# Altium PCB PCB_EECD1_2_2023-01-18.pcbdoc
Units mm, origin at the board's own origin, x right, y up, seen from the top; angles counter-clockwise.
Board outline 94.24 x 78.84 mm, 2 copper layers (Top Layer, Bottom Layer); 37 components, 61 nets, 163 pads, 0 vias.
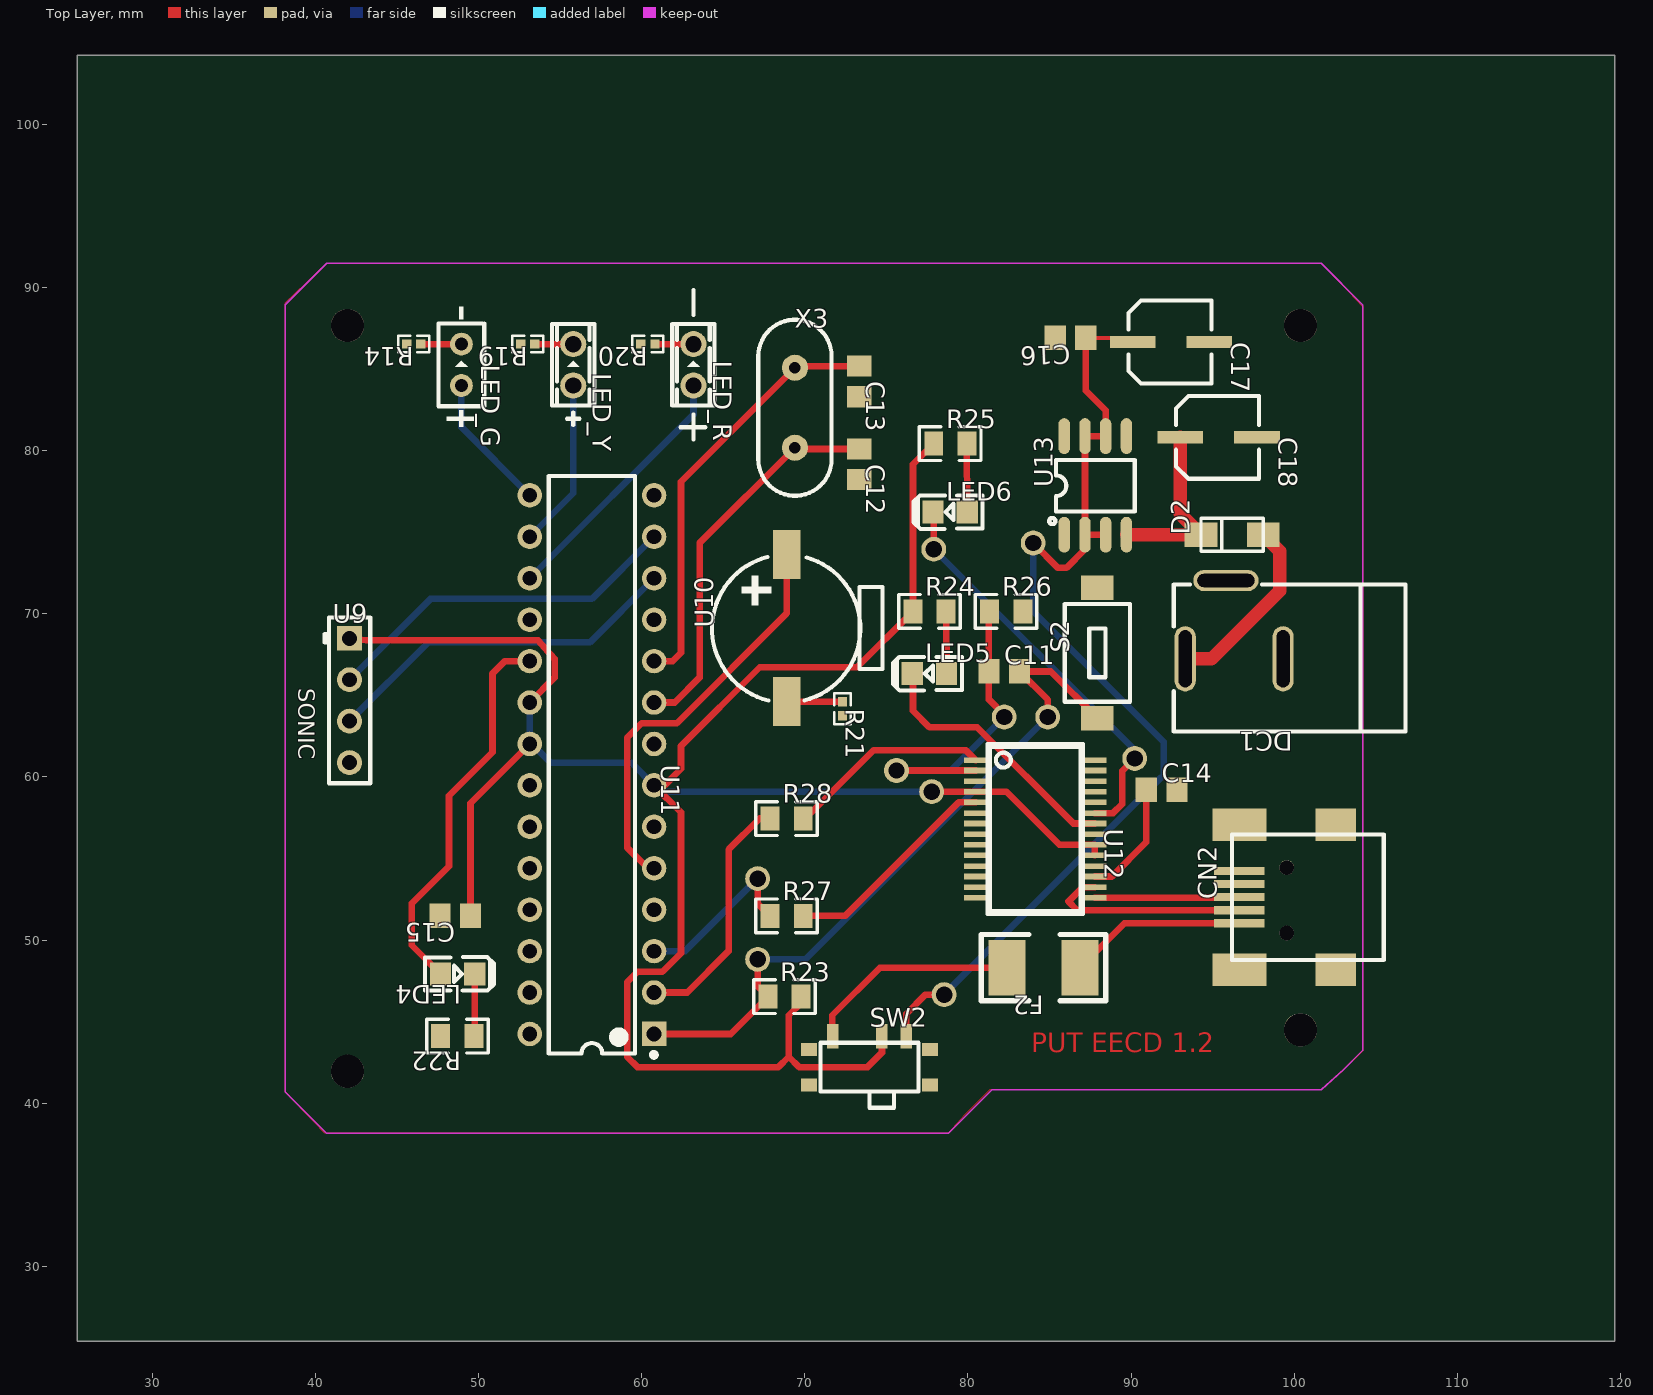
[diagram p0: Top Layer view]
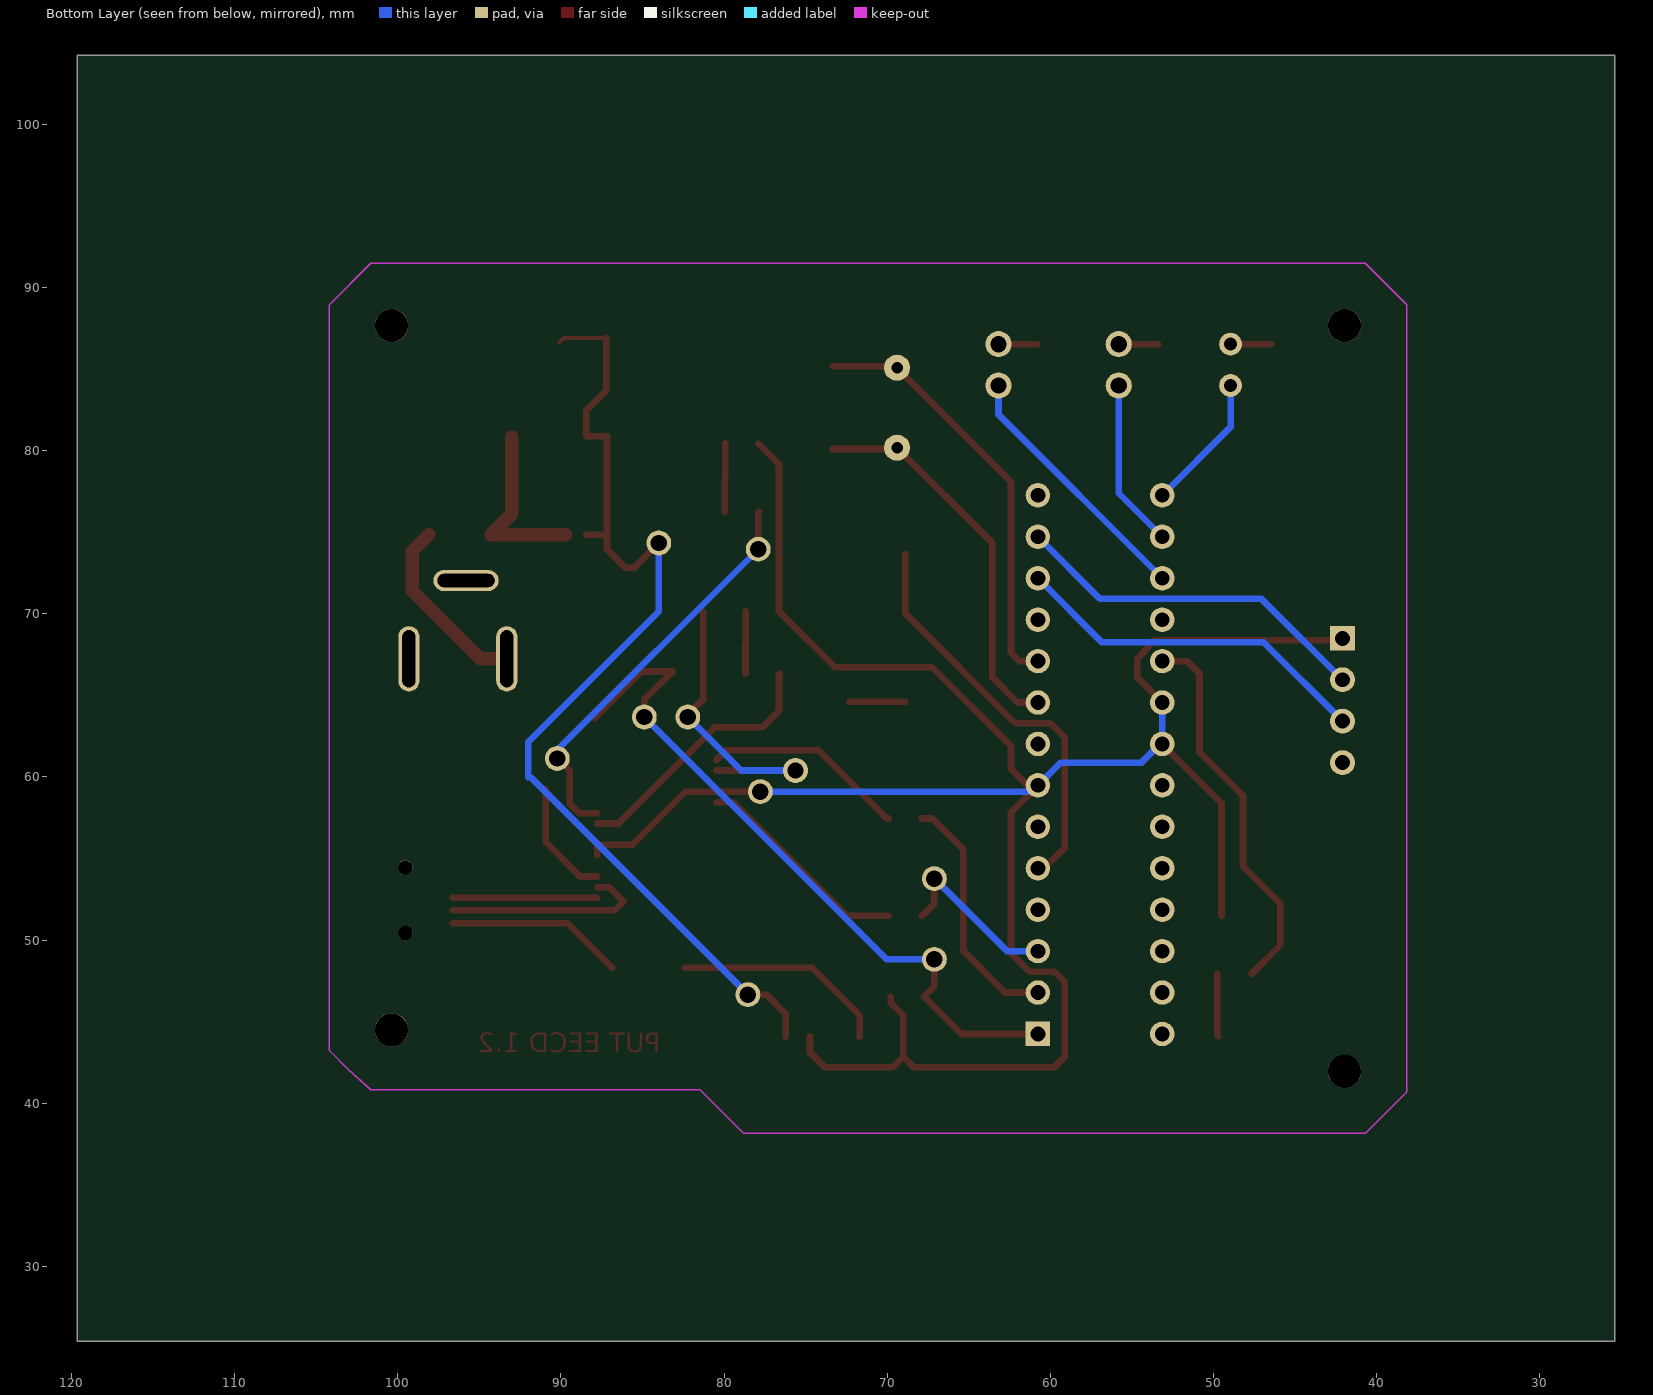
[diagram p1: Bottom Layer view, seen from below]

## Layer stack, top to bottom
Top Layer: signal copper (thickness not stored)
Dielectric: dielectric 0.32, FR-4, Dk 4.8
Bottom Layer: signal copper (thickness not stored)

## Board outline
119.643,25.4 25.4,25.4 25.4,104.24 119.643,104.24

## Components (designator, comment, footprint, x,y, rotation, side; value= is the part's Value field where it differs from the comment)
C11 "CAPACITOR_NPOL-0805" C805 82.219,66.471 r0 top
C12 "CAPACITOR_NPOL-0805" C805 73.329,79.171 r90 top
C13 "CAPACITOR_NPOL-0805" C805 73.329,84.251 r270 top
C14 "CAPACITOR_NPOL-0805" C805 91.871,59.232 r0 top
C15 "CAPACITOR_NPOL-0805" C805 48.564,51.485 r180 top
C16 "CAPACITOR_NPOL-0805" C805 86.283,86.918 r180 top
C17 "47uF" "PANASONIC SMD CAP SIZE D" 93.395,86.664 r270 top
C18 "47uF" "PANASONIC SMD CAP SIZE D" 96.316,80.822 r270 top
CN2 "USB - Mini USB" "MINI USB" 102.539,48.183 r90 top
D2 "diode_smd_m7" DIODE_SMD_M7 96.57,74.853 r90 top
DC1 "DC-005 5.5-2.0MM" DC-IN-TH_DC-5520-1 96.316,69.646 r180 top
F2 "FUSEF" 1812 84.632,48.31 r180 top
LED4 "17-21/GHC-YR1S2/3T" LED-0805 48.691,47.929 r180 top
LED5 "17-21/GHC-YR1S2/3T" LED-0805 77.647,66.344 r0 top
LED6 "17-21/GHC-YR1S2/3T" LED-0805 78.917,76.25 r0 top
LED_G "TJ-L257SSGHKMCGSFLC7K-A5" LED-TH_L5.0-W2.0-RD 48.945,85.267 r270 top
LED_R "TJ-L257SSGHRMTCLFLC3R-A5" LED-TH_L5.0-W2.6-P2.54-RD_RED 63.169,85.267 r270 top
LED_Y "TJ-L257SSGCYMCGSFLC9Y-A5" LED-TH_L5.0-W2.6-RD 55.803,85.267 r270 top
R14 "221Ω" R0402 46.024,86.537 r180 top
R19 "221Ω" R0402 53.009,86.537 r180 top
R20 "221Ω" R0402 60.375,86.537 r180 top
R21 "221Ω" R0402 72.313,64.185 r270 top
R22 "200" 0805 49.707,44.119 r180 top
R23 "0.22OHM-1_4W-1%(0805)" 0805 67.741,46.532 r0 top
R24 "200" 0805 76.631,70.154 r0 top
R25 "200" 0805 77.901,80.441 r0 top
R26 "200" 0805 81.33,70.154 r0 top
R27 "200" 0805 67.868,51.485 r0 top
R28 "200" 0805 67.868,57.454 r0 top
S2 "Button1" "SMD PUSH BUTTON" 87.934,67.614 r90 top
SW2 "SW-SLIDE" SLIDE_SWITCH_SMD 73.964,42.214 r0 top
U9 "HC-SR04" HC-SR04 42.087,58.343 r0 top
U10 "1536" BUZ-SMD_BUZZER 68.884,69.138 r90 top
U11 "ATMEGA328P-PU" DIP-28_300MIL 53.136,77.266 r270 top
U12 "FT232RLSSOP" SSOP28DB 84.124,56.819 r270 top
U13 "MC33269DR2-3.3" SOIC-8_150MIL 85.902,75.488 r90 top
X3 "16MHZ" OSC-49S-1 69.392,80.187 r0 top

## Footprints (in the part's own frame and the unit in brackets; to place one, negate y for a bottom-side part, rotate by r counter-clockwise, add the part's x,y. Pads: shape width x height; smd on the part's side, far side on the other; paste and mask are expansions set on the pad)
0805 [mm]
  rect 1.16x1.47 smd: 1(0,0) 2(2.032,0)
  silkscreen extent -0.88,-1.04 2.89,1.04
1812 [mil]
  rect 90x133.86 smd: 1(-88,0) 2(88,0)
  silkscreen extent -150,-80 150,80
BUZ-SMD_BUZZER [mm]
  rect 3x1.7 smd: 1(-4.515,0) 2(4.515,0)
  silkscreen extent -4.45,-5.86 4.35,4.57
C805 [mil]
  rect 51.2x59.1 smd: 1(-37,0) 2(37,0)
DC-IN-TH_DC-5520-1 [mm]
  oval 4x1.3 hole 0.8 slot 3.5 at 0 deg: 2(0.5,-2.4)
  oval 1.3x4 hole 0.8 slot 3.5 at 90 deg: 3(-3,2.4) 4(3,2.4)
  silkscreen extent -10.5,-2.16 3.7,6.85
DIODE_SMD_M7 [mm]
  rect 1.5x2 smd: 1(0,2.286) 2(0,-1.524)
  silkscreen extent -1.02,-1.52 1.02,2.29
DIP-28_300MIL [mm]
  rect 1.5x1.5 hole 0.9: 1(33.02,7.62)
  round 1.5 hole 0.9: 2(30.48,7.62) 3(27.94,7.62) 4(25.4,7.62) 5(22.86,7.62) 6(20.32,7.62) 7(17.78,7.62) 8(15.24,7.62) 9(12.7,7.62) 10(10.16,7.62) 11(7.62,7.62) 12(5.08,7.62) 13(2.54,7.62) 14(0,7.62) 15(0,0) 16(2.54,0) 17(5.08,0) 18(7.62,0) 19(10.16,0) 20(12.7,0) 21(15.24,0) 22(17.78,0) 23(20.32,0) 24(22.86,0) 25(25.4,0) 26(27.94,0) 27(30.48,0) 28(33.02,0)
  silkscreen extent -1.19,1.16 34.45,7.76
HC-SR04 [mil]
  rect 60x60 hole 36: 1(0,400)
  round 60 hole 36: 2(0,300) 3(0,200) 4(0,100)
  silkscreen extent -60,50 50,450
LED-0805 [mil]
  rect 51.2x55.1 smd: 1(40.7,0.05) 2(-42,0.05)
  silkscreen extent -88,-41 78,40
LED-TH_L5.0-W2.0-RD [mm]
  round 1.4 hole 0.8: 1(-1.27,0) 2(1.27,0)
  silkscreen extent -3.56,-1.4 3.81,1.4
LED-TH_L5.0-W2.6-P2.54-RD_RED [mm]
  round 1.6 hole 1: 1(-1.27,0) 2(1.27,0)
  silkscreen extent -4.59,-1.3 4.57,1.3
LED-TH_L5.0-W2.6-RD [mm]
  round 1.6 hole 1: 1(-1.27,0) 2(1.27,0)
  silkscreen extent -2.5,-1.3 3.68,1.3
"MINI USB" [mm]
  rect 0.5x3.1 smd: 1(2.85,5.9) 2(3.65,5.9) 3(4.45,5.9) 4(5.25,5.9) 5(6.05,5.9)
  rect 2x2.5 smd: 6(0,0) 7(8.9,0)
  rect 2x3.3 smd: 8(0,5.9) 9(8.9,5.9)
  round 0.9 hole 0.9 unplated: ""(2.25,3) ""(6.261,3)
  silkscreen extent 0.6,-2.95 8.3,6.35
OSC-49S-1 [mm]
  round 1.6 hole 0.7: 1(0,4.9) 2(0,0)
  silkscreen extent -2.25,-2.94 2.25,7.84
"PANASONIC SMD CAP SIZE D" [mm]
  rect 0.75x2.8 smd: 1(0,-3.302) 2(0,1.4)
  silkscreen extent -2.54,-3.56 2.54,1.52
R0402 [mm]
  rect 0.566x0.54 smd: 1(-0.433,0) 2(0.433,0)
  silkscreen extent -0.94,-0.5 0.94,0.5
SLIDE_SWITCH_SMD [mil]
  rect 27.6x59.1 smd: COM(30,74) NC(89,74) NO(-89,74)
  rect 39.4x31.5 smd: P$1(-146,-43) P$2(-146,43) P$3(146,43) P$4(146,-43)
  silkscreen extent -118,-98 118,59
"SMD PUSH BUTTON" [mm]
  rect 1.5x2 smd: 1(4.002,0.001) 2(-4,0)
  silkscreen extent -3,-2 3,2
SOIC-8_150MIL [mm]
  oval 2.2x0.7 smd: 1(-0.635,0) 2(-0.635,-1.27) 3(-0.635,-2.54) 4(-0.635,-3.81) 5(5.41,-3.81) 6(5.41,-2.54) 7(5.41,-1.27) 8(5.41,0)
  silkscreen extent 0.01,-4.32 3.94,0.93
SSOP28DB [mil]
  rect 13.7x55 smd: 1(-166,-144) 2(-141,-144) 3(-115,-144) 4(-90,-144) 5(-64,-144) 6(-38,-144) 7(-13,-144) 8(13,-144) 9(38,-144) 10(64,-144) 11(90,-144) 12(115,-144) 13(141,-144) 14(166,-144) 15(166,144) 16(141,144) 17(115,144) 18(90,144) 19(64,144) 20(38,144) 21(13,144) 22(-13,144) 23(-38,144) 24(-64,144) 25(-90,144) 26(-115,144) 27(-141,144) 28(-166,144)
  silkscreen extent -205,-115 205,115

## Free pads (board coordinates)
  round 1.524 hole 1: 1(77.774,59.105) 5(77.901,73.964) 9(90.22,61.137) 10(83.997,74.345) 11(78.536,46.659) 12(84.886,63.677) 14(67.106,48.818) 16(82.219,63.677) 17(75.615,60.4) 18(67.106,53.771)
  round 2.032 hole 2.032 unplated: ""(41.96,41.96) ""(41.96,87.68) ""(100.38,44.5) ""(100.38,87.68)

## Nets (pads, with @x,y where several pads share a name; then routed paths per layer and width w, separated by ;. In a path a pad name is that pad's centre, name@x,y a point inside that pad or via, vN(x,y) a via of type N, cw(c..) or ccw(c..) an arc to the next point about the centre after c; other vN are vias at no path point)
3.3V: C14.1 U12.17 | length 7.2
  Top Layer w0.406: U12.17 88.823,53.898 90.931,56.006 C14.1
5V: C16.1 C17.1 pad.10 pad.11 SW2.NC U13.2 U13.3 U13.6 U13.7 | length 64.1
  Top Layer w0.254: C16.1 89.839,86.918 C17.1
  Top Layer w0.406: SW2.NC 76.225,45.491 77.393,46.659 pad.11 ; pad.10 85.521,72.821 86.029,72.821 87.172,73.964 U13.2 ; C16.1 87.223,83.692 88.442,82.473 U13.6 U13.7 U13.2 ; U13.3 U13.2
  Bottom Layer w0.406: pad.11 91.871,59.994 91.998,59.994 91.998,62.153 83.997,70.154 pad.10
5VUSB: F2.2 SW2.NO | length 13.2
  Top Layer w0.406: SW2.NO 71.678,44.119 71.678,45.389 74.599,48.31 F2.2
A0: U11.23
A1: U11.24
A2: U11.25
A3: U11.26
A4: U11.27
A5: U11.28
CN2_1: CN2.1 F2.1 | length 10.9
  Top Layer w0.406: F2.1 89.59,51.033 CN2.1
CN2_2: CN2.2 U12.16 | length 12.7
  Top Layer w0.406: U12.16 87.02,53.238 86.156,52.374 86.697,51.833 CN2.2
CN2_3: CN2.3 U12.15 | length 8.9
  Top Layer w0.406: U12.15 96.609,52.603 CN2.3
CN2_4: CN2.4
D2: U11.4
D3: U10.2 U11.5 | length 25.5
  Top Layer w0.406: U11.5 60.375,54.406 59.105,55.676 59.105,62.407 59.994,63.296 62.153,63.296 68.884,70.027 U10.2
D4: U11.6
D5: U11.11
D6: U9.3 U11.12 | length 22.3
  Bottom Layer w0.406: U9.3 46.913,68.249 56.819,68.249 U11.12
D7: U9.2 U11.13 | length 22.3
  Bottom Layer w0.406: U9.2 47.04,70.916 56.946,70.916 U11.13
D8: U11.14
D9: LED_G.2 U11.15 | length 8.5
  Bottom Layer w0.406: LED_G.2 48.945,81.457 U11.15
D10: LED_Y.2 U11.16 | length 10.4
  Bottom Layer w0.406: U11.16 55.803,77.393 LED_Y.2
D11: LED_R.2 U11.17 | length 16
  Bottom Layer w0.406: U11.17 63.169,82.219 LED_R.2
D12: U11.18
D13: LED4.1 U11.19 | length 23.8
  Top Layer w0.406: LED4.1 45.897,49.688 45.897,52.247 48.183,54.533 48.183,58.851 48.31,58.978 50.85,61.518 50.85,66.344 51.612,67.106 U11.19
DTR: C11.1 pad.16 pad.17 R26.1 U12.2 | length 19.6
  Top Layer w0.406: pad.17 U12.2 ; R26.1 81.279,70.103 C11.1 81.279,64.744 pad.16@82.219,63.804
  Bottom Layer w0.406: pad.17 78.942,60.4 pad.16
GND: C12.1 C13.2 C14.2 C15.2 C16.2 C17.2 C18.2 CN2.5 CN2.6 CN2.7 CN2.8 CN2.9 DC1.2 DC1.3 R14.2 R19.2 R20.2 R21.2 R22.2 R26.2 S2.1 U9.4 U11.8 U11.22 U12.7 U12.18 U12.21 U12.25 U12.26 U13.1
LED5_2: LED5.2 U12.22 | length 16.3
  Top Layer w0.406: LED5.2 76.631,66.294 76.631,64.058 77.647,63.042 80.568,63.042 86.461,57.149 U12.22
LED6_2: LED6.2 pad.5 pad.9 U12.23 | length 25.3
  Top Layer w0.406: LED6.2 77.901,76.2 pad.5 ; U12.23 88.899,57.784 89.458,58.343 89.458,60.375 pad.9
  Bottom Layer w0.406: pad.5 90.22,61.645 pad.9
R14_1: LED_G.1 R14.1 | length 2.5
  Top Layer w0.406: R14.1 LED_G.1
R19_1: LED_Y.1 R19.1 | length 2.4
  Top Layer w0.406: R19.1@53.39,86.537 LED_Y.1@55.751,86.537
R20_1: LED_R.1 R20.1 | length 2.4
  Top Layer w0.406: R20.1 61.513,86.537 LED_R.1
R21_1: R21.1 U10.1 | length 3.4
  Top Layer w0.406: U10.1 R21.1
R22_1: LED4.2 R22.1 | length 3.8
  Top Layer w0.406: R22.1 49.758,44.17 LED4.2
R24_2: LED5.1 R24.2 | length 3.8
  Top Layer w0.406: R24.2 LED5.1
R25_2: LED6.1 R25.2 | length 4.2
  Top Layer w0.406: R25.2 LED6.1
R27_2: R27.2 U12.5 | length 13.4
  Top Layer w0.406: R27.2 72.465,51.485 79.425,58.445 U12.5
R28_2: R28.2 U12.1 | length 12.6
  Top Layer w0.406: R28.2 70.027,57.454 74.218,61.645 79.857,61.645 U12.1
RX: R28.1 U11.2 | length 15.2
  Top Layer w0.406: U11.2 62.788,46.786 65.328,49.326 65.328,55.549 67.233,57.454 R28.1
S$18: 
S$20: 
S$5875: 
TX: pad.18 R27.1 U11.3 | length 10.8
  Top Layer w0.406: pad.18 67.106,52.247 R27.1
  Bottom Layer w0.406: U11.3 62.661,49.326 pad.18
U11_1: C11.2 pad.12 pad.14 R23.1 S2.2 U11.1 | length 44
  Top Layer w0.406: U11.1 65.456,44.246 R23.1 67.106,47.167 pad.14 ; C11.2@83.159,66.395 C11.2 ; pad.12 84.886,64.744 C11.2 ; S2.2 85.077,66.471 C11.2
  Bottom Layer w0.406: pad.14 70.027,48.818 pad.12
U11_9: C12.2 U11.9 X3.2 | length 23.9
  Top Layer w0.406: U11.9 62.026,64.566 63.55,66.09 63.55,74.345 X3.2 69.468,80.111 C12.2
U11_10: C13.1 U11.10 X3.1 | length 26.2
  Top Layer w0.406: U11.10 61.899,67.106 62.407,67.614 62.407,78.102 X3.1 69.496,85.191 C13.1
U12_3: U12.3
U12_6: U12.6
U12_9: U12.9
U12_10: U12.10
U12_11: U12.11
U12_12: U12.12
U12_13: U12.13
U12_14: U12.14
U12_27: U12.27
U12_28: U12.28
U13_4: C18.1 D2.1 U13.4 | length 11.1
  Top Layer w0.813: U13.4 D2.1 93.014,76.123 C18.1
U13_5: U13.5
U13_8: U13.8
VCC: C15.1 pad.1 R23.2 R24.1 R25.1 SW2.COM U9.1 U11.7 U11.20 U11.21 U12.4 U12.19 U12.20 | length 142.7
  Top Layer w0.406: U9.1 43.103,68.376 53.644,68.376 54.66,67.233 54.66,66.09 U11.20 ; C15.1 49.504,58.394 U11.21 ; R23.2 69.773,46.151 69.011,45.389 69.011,42.849 ; SW2.COM 74.726,43.103 73.837,42.214 69.646,42.214 69.011,42.849 ; pad.1 U12.4 82.346,59.105 85.597,55.854 U12.20 U12.19 ; R25.1 76.631,79.171 R24.1 73.203,66.725 67.233,66.725 62.407,61.899 62.407,60.502 61.391,59.486 U11.7 62.407,57.835 62.407,49.199 61.264,48.056 59.74,48.056 59.105,47.421 59.105,42.849 59.74,42.214 68.376,42.214 69.011,42.849
  Bottom Layer w0.406: U11.20 U11.21 53.263,62.026 54.406,60.883 59.359,60.883 U11.7 ; pad.1 U11.7@61.137,59.105 ; U11.7 U11.7@61.137,59.105 ; U11.7 U11.7@61.137,59.105
VIN: D2.2 DC1.4 | length 11.4
  Top Layer w0.813: DC1.4 94.932,67.246 99.11,71.424 99.11,73.837 D2.2
pads on no net: CN2. SW2.P$1 SW2.P$2 SW2.P$3 SW2.P$4 U12.8 U12.24

## Polygon pours and split planes (outlines as drawn)
GND on Top Layer (solid): 78.79,38.15 40.563,38.15 38.15,40.69 38.15,89.077 40.69,91.49 101.65,91.49 102.92,90.22 104.19,88.823 104.19,45.897 104.19,43.23 102.92,41.96 101.65,40.817 99.11,40.817 81.33,40.817 79.806,39.293

## Other copper
Top Layer:
  text "PUT EECD 1.2" at 83.87,42.722 h2.03

## Text inside footprints (layer, text, board x,y; h text height)
U9: Top Overlay "SONIC" at 38.948,65.455 h1 r270